# Altium PCB PCB2.PcbDoc (part 3 of 3)
Units mil, origin at the board's own origin, x right, y up, seen from the top; angles counter-clockwise.
Board outline 5145 x 1874.68 mil, 6 copper layers (Top Copper, Signal Layer 1, Signal Layer 2, Signal Layer 3, Signal Layer 4, Bottom Copper), stack 60.567 mil thick; 68 components, 78 nets, 530 pads, 288 vias.
Unrouted connection lines stored in the file: 13.
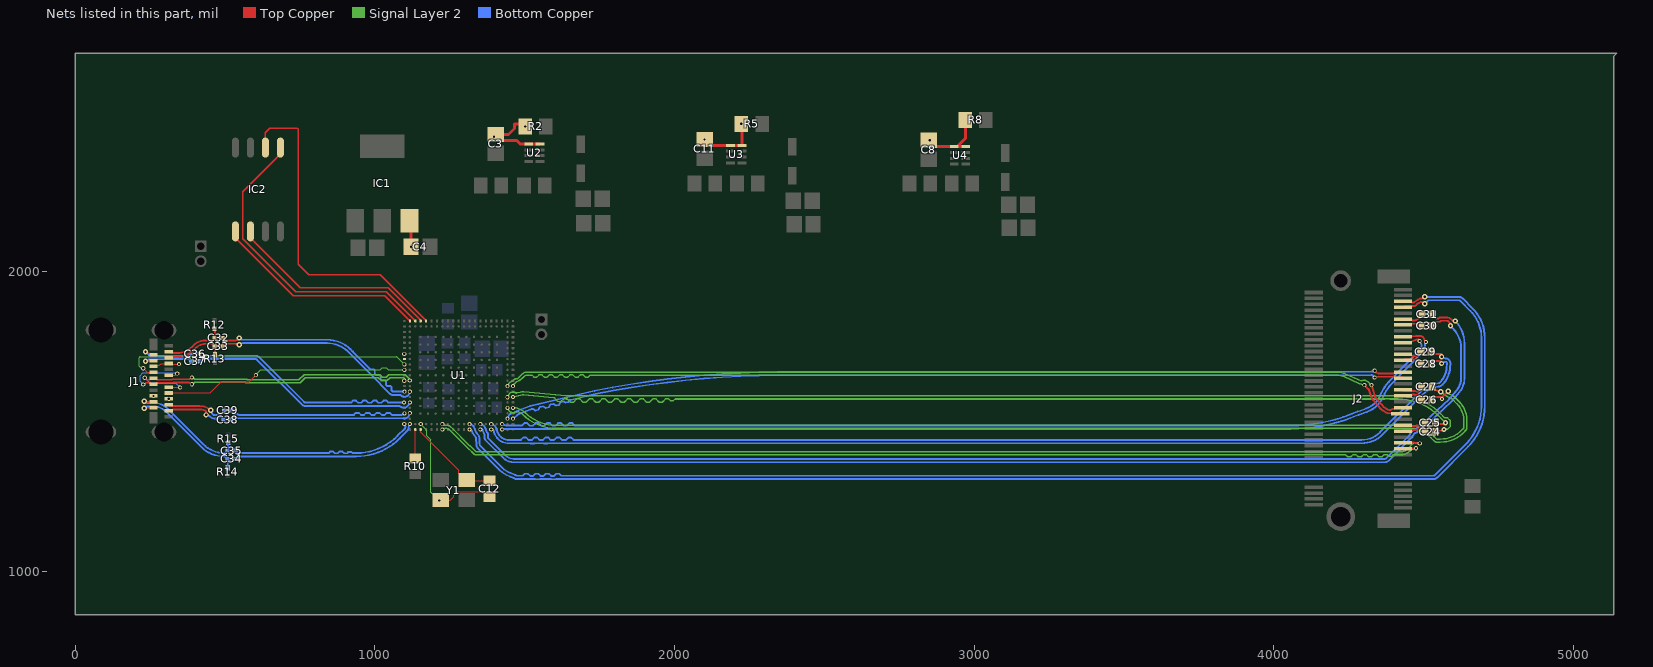
[diagram p6: the nets of this part, all layers, seen from the top]

## Via types
v1: diameter 13.78, hole 7.87, Top Copper to Bottom Copper, 220 vias
v2: diameter 11.81, hole 7.87, Top Copper to Bottom Copper, 44 vias
v3: diameter 17.72, hole 7.87, Top Copper to Bottom Copper, 24 vias

## Nets (pads, with @x,y where several pads share a name; then routed paths per layer and width w, separated by ;. In a path a pad name is that pad's centre, name@x,y a point inside that pad or via, vN(x,y) a via of type N, cw(c..) or ccw(c..) an arc to the next point about the centre after c; other vN are vias at no path point) (continued)
PRX0_N: J2.41 U1.N20 | length 3068.1
  Top Copper w6.22: v1(4326.12,1622.05) 4327.5,1616.99 ccw(c4333.5,1618.66) 4327.55,1616.82 4338.33,1582.02 ccw(c4344.27,1583.89) 4339.63,1579.73 ; 4339.66,1579.71 4357.48,1560.08 4359,1558.41 cw(c4347.19,1547.69) 4359.51,1557.81 4363.05,1553.51 4365.76,1550.2 cw(c4360.98,1546.23) 4365.8,1550.16 4365.84,1550.11 ccw(c4378.94,1560.78) 4372.38,1545.21 cw(c4370,1539.46) 4372.83,1545 4373.17,1544.83 cw(c4365.23,1529.3) 4375.23,1543.59 4377.1,1542.28 ccw(c4386.81,1556.1) 4392.81,1540.31 4403.7,1544.45 J2.41@4431.1,1547.24
  Signal Layer 2 w5.12: v1(1442.99,1618.78) 1444.11,1619.24 ccw(c1439.92,1622.18) 1444.77,1620.56 ccw(c1439.92,1622.18) 1444.97,1621.35 cw(c1461.1,1618.78) 1446.49,1626.1 cw(c1461.1,1618.78) 1450.05,1630.81 cw(c1461.1,1618.78) 1458.45,1634.9 ccw(c1457.57,1639.94) 1461.16,1636.3 1467.01,1642.14 cw(c1469.02,1640.12) 1469.02,1642.97 1471.84,1642.97 ccw(c1471.84,1652.63) 1478.67,1645.8 1490.66,1657.79 cw(c1509.59,1638.86) 1509.59,1665.63 2812.31,1665.63 4216.84,1665.63 cw(c4216.84,1660.51) 4217.43,1665.59 4218.01,1665.53 cw(c4216.26,1650.4) 4219.69,1665.24 4233.1,1662.13 cw(c4229.71,1647.28) 4236.01,1661.15 4236.87,1660.76 4283.17,1639.9 ccw(c4285.27,1644.56) 4283.22,1639.88 4283.49,1639.76 ; 4283.54,1639.74 4290.51,1636.59 ccw(c4292.61,1641.26) 4294.88,1636.67 cw(c4302.17,1622.05) 4313.31,1634 v1(4326.12,1622.05)
PRX0_P: J2.43 U1.N21 | length 3066.9
  Top Copper w6.22: v1(4302.17,1622.05) 4314.21,1610.07 ccw(c4326.12,1622.05) 4315.82,1608.66 cw(c4312.07,1603.7) 4317.93,1605.79 4327.84,1578.02 ccw(c4344.27,1583.89) 4331.2,1572.33 4357.87,1542.16 ccw(c4378.94,1560.78) 4367.71,1535 ; 4367.74,1534.99 cw(c4365.19,1529.31) 4368.74,1534.43 4370.77,1533.01 ccw(c4386.81,1556.1) 4386.81,1527.99 4395.08,1527.99 J2.43@4424.36,1530.35
  Signal Layer 2 w5.12: v1(1461.1,1618.78) cw(c1466.76,1618.78) v1@1462.31,1622.27 ; v1@1462.31,1622.28 1465.31,1626.09 cw(c1469.32,1622.91) 1465.68,1626.51 1469.2,1630.03 cw(c1476.03,1623.2) 1471.48,1631.72 1473.61,1632.86 1480.46,1636.52 ccw(c1471.84,1652.63) 1483.61,1638.65 1497.41,1650.26 ccw(c1494.12,1654.18) 1497.72,1650.55 1497.76,1650.59 cw(c1509.65,1638.69) 1509.65,1655.51 1521.65,1655.51 1524.21,1655.51 1530.88,1648.84 1540.88,1648.84 1548.06,1656.02 1558.06,1656.02 1565.24,1648.84 1575.24,1648.84 1582.43,1656.02 1592.43,1656.02 1599.61,1648.84 1609.61,1648.84 1616.79,1656.02 1626.79,1656.02 1633.97,1648.84 1643.97,1648.84 1651.15,1656.02 1661.15,1656.02 1668.33,1648.84 1678.33,1648.84 1685.51,1656.02 1695.51,1656.02 1702.69,1648.84 1712.69,1648.84 1719.36,1655.51 1745.08,1655.51 2809.44,1655.51 4212.65,1655.51 4215.1,1655.51 4216.26,1655.51 cw(c4216.26,1650.4) 4217.41,1655.38 4230.87,1652.26 cw(c4229.71,1647.28) 4231.8,1651.95 4232.72,1651.54 4286.39,1627.35 ccw(c4292.61,1641.26) 4287.82,1626.8 v1(4302.17,1622.05)
PRX1_N: J2.29 U1.W20 | length 3019.5
  Top Copper w6.22: v1(4336.74,1670.57) ccw(c4342.83,1671.84) 4338.41,1667.46 4340.68,1665.19 ccw(c4345.08,1669.59) 4342.7,1663.84 4348.12,1661.6 ccw(c4350.5,1667.35) 4350.5,1661.12 4399.04,1661.12 ccw(c4399.04,1663.58) 4400.78,1661.84 cw(c4402.51,1660.11) 4402.51,1662.56 4424.36,1662.56 ccw(c4424.36,1672.1) J2.29@4431.1,1665.35
  Bottom Copper w6.22: v1(1442.99,1510.12) ccw(c1439.5,1513.61) v1@1443.04,1510.16 ; v1@1443.02,1510.18 1443.87,1511.68 ccw(c1438.44,1514.71) 1444.5,1513.29 cw(c1465.03,1509.37) 1451.8,1525.56 cw(c1465.03,1509.37) 1455.57,1528.01 cw(c1458.36,1522.45) 1457.34,1528.59 1463.88,1529.68 ccw(c1461.1,1546.34) 1472.06,1533.49 cw(c1483.3,1520.14) 1476.99,1536.41 1516.49,1551.68 cw(c1522.78,1535.41) 1518.75,1552.39 1733.13,1603.03 cw(c2360.86,-1485.61) 1733.4,1603.08 cw(c2360.86,-1485.61) 2343.82,1666.12 4325.76,1667.17 cw(c4325.72,1649.72) 4326.52,1667.15 4330.78,1666.95 ccw(c4331.07,1673.17) 4336.51,1670.15 v1(4336.74,1670.57)
PRX1_P: J2.31 U1.W21 | length 3008
  Top Copper w6.22: 4344.62,1649.9 4399.04,1649.9 cw(c4399.04,1647.45) 4400.78,1649.18 ccw(c4402.51,1650.92) 4402.51,1648.46 4424.36,1648.46 cw(c4424.36,1638.92) J2.31@4431.1,1645.67
  Bottom Copper w6.22: v1(1461.1,1510.12) 1474.91,1521.63 1475.46,1522.09 cw(c1479.42,1517.3) 1476.09,1522.55 ccw(c1461.1,1546.34) 1479.31,1524.91 cw(c1483.3,1520.14) 1481.08,1525.95 1520.56,1541.23 cw(c1522.78,1535.41) 1521.33,1541.46 1523.29,1541.93 1527.29,1542.87 1535.81,1537.61 1545.54,1539.91 1550.8,1548.43 1551.26,1549.17 1560.99,1551.47 1561.74,1551.01 1570.26,1545.75 1579.99,1548.05 1585.25,1556.56 1585.72,1557.31 1595.45,1559.61 1596.2,1559.15 1604.71,1553.89 1614.45,1556.19 1619.71,1564.7 1620.17,1565.45 1629.9,1567.75 1630.65,1567.29 1636.54,1563.65 1646.27,1565.95 1649.91,1571.84 1652.94,1572.55 1670.35,1576.67 1735.54,1592.06 cw(c2360.86,-1485.61) 2343.14,1654.9 cw(c2364.34,-2129.91) 2343.74,1654.9 ; 2343.82,1654.9 2343.88,1654.9 4325.72,1655.94 cw(c4325.72,1649.72) 4330.1,1654.14 v1(4336.61,1647.64)
PRX2_N: J2.17 U1.AA19 | length 3294.3
  Top Copper w6.22: J2.17@4431.1,1783.46 4458.5,1784.98 4469.89,1784.98 ccw(c4470,1801.88) 4474.84,1785.69 cw(c4479.79,1768.97) 4479.83,1786.41 4486.6,1786.4 cw(c4486.56,1769.51) 4501.91,1776.57 4505.7,1768.34 ccw(c4511.33,1770.98) v1(4507.57,1766.02)
  Bottom Copper w6.22: v1(1424.88,1473.9) 1425.34,1473.94 ccw(c1424.77,1480.14) 1426.17,1474.07 1433.39,1475.74 cw(c1434.79,1469.68) 1434.79,1475.9 1516.38,1475.9 cw(c1516.38,1469.68) 1518,1475.68 ccw(c1521,1486.5) 1521,1475.28 1523.57,1475.28 1575.25,1475.28 1588.82,1475.28 1594.02,1475.28 1627.16,1475.28 1631.41,1475.28 ccw(c1631.39,1481.5) 1631.6,1475.28 1652.34,1475.9 cw(c1652.52,1469.68) 1652.52,1475.9 4056.53,1475.9 ccw(c4056.24,2044.17) 4056.58,1475.9 ccw(c4056.24,2044.17) 4282.35,1522.82 4311.18,1532.98 4311.26,1533.01 ccw(c4278.52,1622.69) 4364.97,1582.17 4368.76,1590.22 ccw(c4352.98,1597.66) 4369.12,1591.04 ccw(c4363.39,1593.45) 4369.18,1591.19 4370.11,1593.57 4370.44,1594.4 cw(c4484,1536.6) 4392.21,1624.98 4499.87,1736.88 ccw(c4487.27,1748.94) 4504.57,1746.69 ccw(c4470.54,1750.99) 4504.15,1757.84 cw(c4510.25,1759.03) 4505.35,1762.86 4505.72,1763.33 ccw(c4500.84,1767.19) 4506.41,1764.43 cw(c4511.97,1761.62) v1(4507.57,1766.02)
PRX2_P: J2.19 U1.Y19 | length 3291.6
  Top Copper w6.22: J2.19@4431.1,1763.78 4458.5,1766.57 4472.75,1772.85 cw(c4475.26,1767.16) 4472.96,1772.94 4477.49,1774.75 cw(c4479.79,1768.97) 4485.28,1771.9 v1(4486.56,1769.51)
  Bottom Copper w6.22: v1(1424.88,1492.01) 1437.63,1487.48 ccw(c1439.69,1493.35) 1439.69,1487.12 1487.64,1487.12 1490.75,1487.12 1498.95,1495.32 1508.95,1495.32 1517.77,1486.5 1527.77,1486.5 1536.6,1495.32 1546.6,1495.32 1555.42,1486.5 1565.42,1486.5 1574.24,1495.32 1584.24,1495.32 1593.06,1486.5 1603.06,1486.5 1611.88,1495.32 1621.88,1495.32 1630.7,1486.5 1640.7,1486.5 1649.53,1495.32 1659.53,1495.32 1667.73,1487.12 1677.01,1487.12 4056.71,1487.12 ccw(c4056.24,2044.17) 4277.92,1533.13 cw(c4282.35,1522.82) 4278.66,1533.42 4278.86,1533.49 4307.42,1543.55 4307.53,1543.59 ccw(c4278.52,1622.69) 4354.54,1586.37 ccw(c4278.52,1622.69) 4354.82,1586.97 4360.19,1598.98 cw(c4370.44,1594.4) 4360.41,1599.44 cw(c4484,1536.6) 4384.11,1632.75 4491.78,1744.66 ccw(c4487.27,1748.94) 4493.44,1748.16 ccw(c4470.54,1750.99) 4488.85,1765.03 cw(c4493.83,1768.76) 4488.25,1766.01 4488.52,1765.46 cw(c4493.36,1769.37) 4487.63,1766.95 v1(4486.56,1769.51)
PRX3_N: J2.5 U1.AA13 | length 4200.9
  Top Copper w6.22: J2.5@4431.1,1901.57 ccw(c4437.85,1908.32) 4437.85,1898.78 4459.69,1898.78 cw(c4459.69,1896.33) 4461.43,1898.06 ccw(c4463.16,1899.8) 4463.16,1897.34 4464.75,1897.34 ccw(c4464.75,1903.63) 4469.2,1899.19 ; 4469.23,1899.22 cw(c4473.61,1894.79) 4470.33,1900.08 4481.34,1906.9 ccw(c4472.44,1921.26) 4481.89,1907.26 4486.96,1910.68 cw(c4490.44,1905.52) 4490.44,1911.74 4494.1,1911.74 ccw(c4494.1,1917.97) 4497.86,1913.01 v3(4503.6,1917.36)
  Bottom Copper w6.22: v1(1316.22,1473.9) cw(c1315.66,1467.7) 1319.79,1472.36 1323.27,1469.27 cw(c1319.14,1464.62) 1324.89,1467 1326.42,1463.25 ccw(c1352.44,1473.9) 1330.47,1456.35 1336.41,1448.9 cw(c1331.55,1445.02) 1337.76,1445.4 1338.92,1423 ccw(c1356.34,1423.91) 1343.96,1411.62 1417.18,1338.4 ccw(c1476.62,1397.48) 1450.35,1317.89 1450.41,1317.88 ; 1450.45,1317.86 1450.86,1317.73 cw(c1448.91,1311.82) 1451.39,1317.53 1463.17,1312.32 cw(c1460.66,1306.63) 1463.93,1311.92 ccw(c1501.02,1370.89) 1465.95,1310.7 ccw(c1471.54,1320.43) 1466.26,1310.53 ccw(c1474.6,1325.85) 1474.53,1308.41 1532.99,1308.41 cw(c1532.96,1302.18) 1534.58,1308.19 ccw(c1537.57,1319.01) 1537.57,1307.78 1547.57,1307.78 ccw(c1547.57,1319.01) 1550.57,1308.19 cw(c1552.19,1302.18) 1552.16,1308.41 1586.93,1308.41 cw(c1586.9,1302.18) 1588.52,1308.19 ccw(c1591.52,1319.01) 1591.52,1307.78 1601.52,1307.78 ccw(c1601.52,1319.01) 1604.52,1308.19 cw(c1606.13,1302.18) 1606.1,1308.41 1607.46,1308.41 4532.6,1308.41 ccw(c4532.6,1325.85) 4544.9,1313.47 4648.68,1417.26 ; v3(4503.6,1917.36) cw(c4500.69,1911.87) 4503.81,1917.25 ccw(c4506.93,1922.64) 4506.93,1916.42 4617.7,1916.42 cw(c4617.7,1898.97) 4629.99,1911.35 4664.08,1877.26 cw(c4567.39,1780.56) 4704.14,1780.56 4704.14,1551.14 cw(c4514.79,1551.14) 4648.71,1417.29
PRX3_P: J2.7 U1.Y13 | length 4197.6
  Top Copper w6.22: J2.7@4431.1,1881.89 cw(c4437.85,1875.14) 4437.85,1884.68 4459.69,1884.68 ccw(c4459.69,1887.14) 4461.43,1885.4 cw(c4463.16,1883.67) 4463.16,1886.12 4467.39,1886.12 ccw(c4467.39,1897.27) 4475.27,1889.39 4479.03,1893.14 cw(c4483.41,1888.72) 4480.52,1894.23 ; 4480.53,1894.24 4489.83,1899.06 cw(c4492.69,1893.53) 4496.52,1898.44 cw(c4490.48,1890.7) 4497.42,1897.64 4499.55,1895.52 ccw(c4503.94,1899.91) v3(4503.94,1893.7)
  Bottom Copper w6.22: v1@1317.94,1491.29 ccw(c1321.5,1496.4) 1320.04,1490.35 cw(c1316.22,1473.9) 1322.05,1489.75 cw(c1316.22,1473.9) 1332.64,1477.85 ccw(c1338.68,1479.36) 1332.92,1477 1336.59,1468.04 1336.81,1467.5 ccw(c1352.44,1473.9) 1339.25,1463.35 1345.49,1455.52 cw(c1333.02,1445.58) 1348.94,1446.41 1349.9,1427.89 1350.13,1423.55 ccw(c1356.34,1423.91) 1351.91,1419.53 1425.13,1346.32 ccw(c1471.69,1392.58) 1445.17,1332.54 ; 1445.18,1332.54 1467.71,1322.59 cw(c1460.66,1306.63) 1469.9,1321.43 ccw(c1501.02,1370.89) 1471.54,1320.43 ; 1471.56,1320.42 ccw(c1474.6,1325.85) 1474.58,1319.63 1477.71,1319.63 1491.14,1319.63 1494.25,1319.63 1501.11,1326.48 1511.11,1326.48 1518.59,1319.01 1528.59,1319.01 1536.07,1326.48 1546.07,1326.48 1553.55,1319.01 1563.55,1319.01 1571.03,1326.48 1581.03,1326.48 1588.51,1319.01 1598.51,1319.01 1605.99,1326.48 1615.99,1326.48 1622.84,1319.63 1679.13,1319.63 4527.95,1319.63 4532.64,1319.63 ccw(c4532.6,1325.85) 4536.98,1321.43 4640.72,1425.16 ; v3(4503.94,1893.7) 4513.63,1903.39 cw(c4518.01,1898.97) 4518.01,1905.19 4617.7,1905.19 cw(c4617.7,1898.97) 4622.1,1903.37 4656.03,1869.43 ; 4640.75,1425.2 ccw(c4514.7,1551.18) 4692.91,1551.18 4692.91,1780.43 ccw(c4567.07,1780.43) 4656.06,1869.41
  other v1: 1316.22,1492.01
PTX0_N: C25.1 J2.47 | length 78.6
  Top Copper w6.22: J2.47@4431.1,1488.19 ccw(c4437.85,1494.93) 4437.85,1485.39 4459.69,1485.39 cw(c4459.69,1482.94) 4461.43,1484.68 ccw(c4463.16,1486.41) 4463.16,1483.96 4470.03,1483.96 ccw(c4470.03,1490.25) 4474.48,1485.8 cw(c4478.93,1481.35) 4478.93,1487.64 4484.98,1487.64 ccw(c4484.98,1516.39) C25.1@4505.31,1496.06
PTX0_P: C24.1 J2.49 | length 79.1
  Top Copper w6.22: J2.49@4431.1,1468.5 cw(c4437.85,1461.76) 4437.85,1471.3 4459.69,1471.3 ccw(c4459.69,1473.75) 4461.43,1472.02 cw(c4463.16,1470.28) 4463.16,1472.74 4474.68,1472.74 ccw(c4474.68,1479.02) 4479.13,1474.58 cw(c4483.58,1470.13) 4483.58,1476.42 4487.35,1476.42 ccw(c4488.31,1477.38) 4488.31,1476.02 4489.48,1476.02 cw(c4489.48,1461.17) 4499.98,1471.67 C24.1@4503.77,1467.88 ; C24.1@4503.78,1467.88 cw(c4502.43,1466.54) C24.1@4504.33,1466.54
PTX0_PD_N: C25.2 U1.R21 | length 3262.6
  Top Copper w6.22: C25.2@4539.96,1496.06 ccw(c4548.18,1504.28) 4548.18,1492.66 4572.17,1492.66 v3(4572.95,1496.2)
  Signal Layer 2 w5.12: v1(1461.1,1582.56) 1464.63,1583.17 ccw(c1463.72,1588.2) 1464.95,1583.23 1487.46,1588.8 cw(c1493.81,1563.11) 1496.34,1589.45 1597.51,1579.72 1600.06,1579.48 1609.66,1567.83 1619.61,1566.87 1631.26,1576.48 1637.7,1575.86 ccw(c1638.15,1580.95) 1637.76,1575.85 1638.02,1575.83 ccw(c1639.18,1591.02) 1639.11,1575.79 1642.11,1575.79 1652.78,1565.12 1662.78,1565.12 1673.45,1575.79 1673.96,1576.3 1683.96,1576.3 1684.47,1575.79 1695.15,1565.12 1705.15,1565.12 1715.82,1575.79 1716.33,1576.3 1726.33,1576.3 1726.84,1575.79 1737.51,1565.12 1747.51,1565.12 1758.19,1575.79 1758.7,1576.3 1768.7,1576.3 1769.21,1575.79 1779.88,1565.12 1789.88,1565.12 1800.55,1575.79 1801.06,1576.3 1811.06,1576.3 1811.58,1575.79 1822.25,1565.12 1832.25,1565.12 1842.92,1575.79 1843.43,1576.3 1853.43,1576.3 1853.94,1575.79 1864.61,1565.12 1874.61,1565.12 1885.29,1575.79 1885.8,1576.3 1895.8,1576.3 1896.31,1575.79 1906.98,1565.12 1916.98,1565.12 1927.65,1575.79 1928.17,1576.3 1938.17,1576.3 1938.68,1575.79 1949.35,1565.12 1959.35,1565.12 1970.02,1575.79 1970.53,1576.3 1980.53,1576.3 1981.04,1575.79 1986.52,1570.31 1996.52,1570.31 2001.99,1575.79 2028,1575.79 4369.93,1575.79 ccw(c4369.88,1591.02) 4374.2,1576.41 cw(c4378.94,1560.78) 4383.7,1576.41 ccw(c4388,1591.02) 4387.92,1575.79 4414.93,1575.79 cw(c4414.83,1386.19) 4548.89,1520.26 v3(4572.95,1496.2)
PTX0_PD_P: C24.2 U1.R20 | length 3267.3
  Top Copper w6.22: C24.2@4538.98,1466.54 cw(c4547.2,1458.31) 4547.2,1469.94 4572.17,1469.94 v3(4568.11,1474)
  Signal Layer 2 w5.12: v1(1442.32,1581.69) 1446.55,1589.98 cw(c1461.1,1582.56) 1467.62,1597.54 cw(c1461.1,1582.56) 1469.76,1596.41 ccw(c1472.44,1600.77) 1473.63,1595.8 1485.12,1598.64 cw(c1493.81,1563.11) 1497.35,1599.51 1638.21,1585.97 1638.73,1585.92 ccw(c1639.19,1591.02) 1639.19,1585.9 4369.91,1585.9 ccw(c4369.88,1591.02) 4371.32,1586.11 cw(c4378.94,1560.78) 4386.56,1586.11 ccw(c4388,1591.02) 4387.97,1585.9 4414.9,1585.9 cw(c4414.83,1386.19) 4556.04,1527.41 4570.84,1512.62 4579.75,1512.62 4589.36,1503 4589.36,1484.22 4580.2,1475.06 4569.17,1475.06 v3(4568.11,1474)
PTX1_N: C27.1 J2.35 | length 72.5
  Top Copper w6.22: J2.35@4431.1,1606.3 ccw(c4437.85,1613.05) 4437.85,1603.51 4459.69,1603.51 cw(c4459.69,1601.05) 4461.43,1602.79 ccw(c4463.16,1604.52) 4463.16,1602.07 4473.48,1602.07 cw(c4473.48,1599.55) 4475.27,1601.33 ccw(c4477.05,1603.11) 4477.05,1600.59 4478.58,1600.59 ccw(c4478.58,1606.81) 4482.98,1602.41 4483.32,1602.76 ; 4483.33,1602.76 ccw(c4479.75,1606.33) 4484.8,1606.33 cw(c4489.86,1606.33) 4486.28,1609.9 C27.1@4493.5,1617.13
PTX1_P: C26.1 J2.37 | length 72.5
  Top Copper w6.22: J2.37@4431.1,1586.61 cw(c4437.85,1579.87) 4437.85,1589.41 4459.69,1589.41 ccw(c4459.69,1591.86) 4461.43,1590.13 cw(c4463.16,1588.39) 4463.16,1590.85 4468.84,1590.85 cw(c4468.84,1588.33) 4470.62,1590.11 ccw(c4472.4,1591.89) 4472.4,1589.37 4478.58,1589.37 cw(c4478.58,1583.15) 4482.98,1587.55 4483.32,1587.2 ; 4483.33,1587.2 cw(c4479.75,1583.63) 4484.8,1583.63 ccw(c4489.86,1583.63) 4486.28,1580.06 C26.1@4493.5,1572.83
PTX1_PD_N: C27.2 U1.U21 | length 3403.2
  Top Copper w6.22: C27.2@4528.15,1617.13 4536.85,1607.64 v3(4556.98,1599.56)
  Signal Layer 2 w5.12: v1(1461.1,1546.34) 1469.59,1546.34 cw(c1469.59,1541.22) 1471.26,1546.06 1484.38,1541.5 cw(c1470.43,1501.02) 1500.76,1531.24 ccw(c1604.79,1635.38) 1604.62,1488.18 1604.75,1488.18 ; 1604.79,1488.18 1903.54,1488.18 4447.45,1488.18 cw(c4447.45,1368.43) 4532.13,1453.11 4543.31,1441.93 4556.02,1441.93 ccw(c4556.02,1541.93) 4626.73,1471.22 4633.86,1478.35 4633.86,1506.28 ccw(c4558.59,1506.28) 4611.81,1559.5 4594.87,1576.45 4594.83,1576.48 ccw(c4591.26,1572.81) 4593.27,1577.52 4579.13,1583.55 cw(c4585.11,1597.56) 4575.67,1585.61 4573.12,1587.63 ccw(c4562.99,1574.8) 4572.41,1588.16 cw(c4581.84,1601.59) 4572.08,1588.39 v3(4556.98,1599.56)
PTX1_PD_P: C26.2 U1.U20 | length 3471.2
  Top Copper w6.22: C26.2@4528.15,1572.83 4536.85,1582.32 4557.21,1582.6 ccw(c4556.98,1599.56) 4569.48,1588.08 v3(4581.84,1601.59)
  Signal Layer 2 w5.12: v1(1442.99,1546.34) 1446.36,1539.29 ccw(c1461.1,1546.34) 1461.23,1530 ccw(c1461.1,1546.34) 1470.18,1532.76 cw(c1473,1528.49) 1473.46,1533.58 cw(c1470.43,1501.02) 1493.6,1524.1 ccw(c1604.79,1635.38) 1604.79,1478.07 1977.64,1478.07 4447.3,1478.07 ; 4447.34,1478.07 cw(c4447.28,1368.01) 4525.1,1445.83 4536.17,1434.76 ccw(c4543.28,1441.87) 4543.28,1431.81 4556.07,1431.81 ccw(c4556.07,1541.81) 4633.85,1464.03 4641.04,1471.23 ccw(c4633.86,1478.35) 4643.97,1478.35 4643.97,1506.28 ccw(c4558.59,1506.28) 4619,1566.62 4601.99,1583.63 ccw(c4591.26,1572.81) 4597.24,1586.82 4583.12,1592.85 cw(c4585.11,1597.56) 4581.27,1600.94 v3(4581.84,1601.59)
  other v1: 4561.39,1575.98
PTX2_N: C29.1 J2.23 | length 67.8
  Top Copper w6.22: J2.23@4431.1,1724.41 4452.22,1724.41 cw(c4452.22,1716) 4458.17,1721.95 ccw(c4464.12,1727.89) 4464.12,1719.48 4475.63,1719.48 ccw(c4475.63,1725.7) 4480.03,1721.3 4480.99,1722.27 ccw(c4478.92,1724.34) 4481.85,1724.34 cw(c4484.78,1724.34) 4482.71,1726.41 C29.1@4490.55,1734.25
PTX2_P: C28.1 J2.25 | length 68
  Top Copper w6.22: J2.25@4431.1,1704.72 cw(c4437.85,1697.98) 4437.85,1707.52 4461.41,1707.52 cw(c4463.2,1705.73) 4463.2,1708.26 4476.61,1708.26 cw(c4476.61,1702.04) 4481.01,1706.44 4482.12,1705.33 cw(c4480.4,1703.61) 4482.84,1703.61 ccw(c4485.27,1703.61) 4483.54,1701.89 C28.1@4491.54,1693.9
PTX2_PD_N: C29.2 U1.AA17 | length 3433
  Top Copper w6.22: C29.2@4525.2,1734.25 ccw(c4546.49,1755.54) 4546.49,1725.43 4560.04,1725.43 v3(4560.04,1717.17)
  Bottom Copper w6.22: v1(1388.66,1473.9) cw(c1390.38,1467.92) 1396.18,1470.17 1397.3,1467.28 cw(c1391.5,1465.02) 1397.54,1466.54 ccw(c1446.72,1478.74) 1449.49,1428.14 cw(c1449.8,1421.93) 1449.76,1428.15 1516.74,1428.15 cw(c1516.71,1421.93) 1518.33,1427.93 ccw(c1521.33,1438.75) 1521.33,1427.53 1531.33,1427.53 ccw(c1531.33,1438.75) 1534.32,1427.94 cw(c1535.94,1421.93) 1535.91,1428.15 1561.33,1428.15 cw(c1561.29,1421.93) 1562.92,1427.93 ccw(c1565.91,1438.75) 1565.91,1427.53 1575.91,1427.53 ccw(c1575.91,1438.75) 1578.91,1427.94 cw(c1580.53,1421.93) 1580.49,1428.15 4293.61,1428.15 4293.8,1428.15 ccw(c4293.7,1525.84) 4362.33,1456.32 ; 4362.34,1456.33 4495.35,1589.34 ; v3(4560.04,1717.17) cw(c4560.04,1709.66) 4565.35,1714.97 4566.02,1714.3 ccw(c4572.96,1721.24) 4572.96,1711.43 4574.07,1711.43 cw(c4574.07,1698.95) 4582.89,1707.77 4584.34,1706.32 cw(c4572.01,1693.98) 4589.45,1693.98 cw(c4545.96,1694) 4588.35,1684.27 ccw(c4594.43,1682.93) 4588.21,1683.13 cw(c4499.91,1685.34) 4565.89,1626.62 4563.07,1623.45 cw(c4550.04,1635.05) 4554.5,1618.19 4554.19,1618.1 cw(c4552.6,1624.12) 4553.99,1618.05 4551.88,1617.57 cw(c4550.49,1623.64) 4550.86,1617.42 4550.76,1617.42 4550.12,1617.38 ccw(c4550.43,1611.17) 4549.42,1617.31 ccw(c4566.36,1518.3) 4495.42,1589.41 ; 4495.36,1589.35 cw(c4505.26,1579.56) 4495.42,1589.41 ; 4495.35,1589.34 4495.42,1589.41
PTX2_PD_P: C28.2 U1.Y17 | length 3439.9
  Top Copper w6.22: C28.2@4526.18,1693.9 cw(c4547.47,1672.61) 4547.47,1702.72 4551.15,1702.72 ccw(c4560.04,1717.17) 4560.04,1700.2 v3(4560.04,1694.46)
  Bottom Copper w6.22: v3(4560.04,1694.46) ccw(c4560.04,1701.97) 4565.35,1696.66 4566.7,1698 cw(c4572.01,1692.69) 4572.01,1700.2 cw(c4572.01,1693.98) 4578.23,1693.97 cw(c4545.96,1694) 4577.42,1686.81 4577.4,1686.74 ccw(c4594.43,1682.93) 4576.99,1683.47 cw(c4499.91,1685.34) 4557.51,1634.08 4554.69,1630.91 cw(c4550.04,1635.05) 4550.98,1628.9 4547.92,1628.44 ccw(c4566.37,1518.3) 4547.31,1628.33 ccw(c4566.37,1518.3) 4547.14,1628.3 ccw(c4566.37,1518.3) 4487.5,1597.36 ccw(c4566.37,1518.3) 4487.46,1597.33 4354.42,1464.28 cw(c4293.7,1525.84) 4293.83,1439.37 1710.07,1439.37 1666.34,1439.37 1663.23,1439.37 1655.82,1446.78 1645.82,1446.78 1638.42,1439.37 1624.42,1439.37 1616.5,1447.29 1606.5,1447.29 1597.97,1438.75 1587.97,1438.75 1579.43,1447.29 1569.43,1447.29 1560.89,1438.75 1550.89,1438.75 1542.35,1447.29 1532.35,1447.29 1523.82,1438.75 1513.82,1438.75 1505.28,1447.29 1495.28,1447.29 1487.36,1439.37 1484.25,1439.37 1449.71,1439.37 ccw(c1449.8,1421.93) 1448.85,1439.35 cw(c1446.72,1478.74) 1408.2,1470.2 1404.43,1479.94 ccw(c1388.66,1473.9) 1393.15,1490.18 cw(c1394.86,1496.16) 1392.46,1490.42 1390.02,1491.45 v1(1388.66,1492.01) ; v1(1388.66,1492.01) cw(c1388.66,1487.07) 1392.15,1490.56 v1(1388.66,1492.01)
PTX3_N: C31.1 J2.11 | length 72.9
  Top Copper w6.22: J2.11@4431.1,1842.52 ccw(c4437.85,1849.27) 4437.85,1839.73 4460.03,1839.73 cw(c4460.03,1838.09) 4461.19,1839.25 ccw(c4463.5,1841.56) 4463.5,1838.29 4471.19,1838.29 ccw(c4471.19,1846.86) 4477.24,1840.79 4479.76,1843.31 ccw(c4479.76,1845.73) 4481.47,1844.02 ; 4481.48,1844.02 4485.35,1847.89 ccw(c4484.3,1848.95) 4485.79,1848.95 cw(c4487.28,1848.95) 4486.23,1850.01 C31.1@4494.49,1858.27
PTX3_P: C30.1 J2.13 | length 66.6
  Top Copper w6.22: J2.13@4431.1,1822.83 4438.18,1822.83 ccw(c4438.18,1827.6) 4441.56,1824.23 4442.95,1825.63 cw(c4446.42,1822.17) 4446.42,1827.07 4477.14,1827.07 cw(c4477.14,1802.54) C30.1@4494.49,1819.88
PTX3_PD_N: C31.2 U1.AA15 | length 3755.1
  Top Copper w6.22: C31.2@4529.13,1858.27 4537.4,1850.01 cw(c4536.34,1848.95) 4537.83,1848.95 ccw(c4539.33,1848.95) 4538.27,1847.89 4539.66,1846.51 ccw(c4544.06,1850.91) 4544.06,1844.69 4547.55,1844.69 ccw(c4547.55,1850.47) 4551.64,1846.38 cw(c4555.73,1842.29) 4555.73,1848.07 4576.35,1848.07 cw(c4576.35,1826.28) 4591.76,1841.69 ccw(c4600.32,1850.26) 4600.32,1838.14 cw(c4600.32,1830.64) v3(4605.63,1835.95)
  Bottom Copper w6.22: v1(1352.44,1473.9) ccw(c1352.44,1478.83) 1355.93,1475.34 cw(c1354.64,1469.26) 1360.47,1471.43 1365.76,1457.27 cw(c1359.92,1455.11) 1366.14,1455.11 1366.14,1446.82 ccw(c1377.29,1446.82) 1369.41,1438.94 1429.73,1378.61 ccw(c1463.17,1412.04) 1463.17,1364.76 4370.85,1364.76 ccw(c4370.85,1382.21) 4383.19,1369.87 4460.93,1447.61 ccw(c4448.54,1459.9) 4464.74,1453.42 cw(c4480.47,1447.26) 4474.3,1462.98 ccw(c4467.83,1479.18) 4479.41,1466.14 4479.93,1466.6 cw(c4484.06,1461.94) 4482.8,1468.04 ccw(c4478.55,1489.15) 4484.78,1468.54 ccw(c4478.55,1489.15) 4487.62,1469.62 ccw(c4480.26,1485.43) 4492.23,1472.75 4592.98,1567.03 ccw(c4581.06,1579.77) 4594.44,1568.57 4613.53,1591.38 cw(c4618.28,1587.37) 4613.91,1591.8 ccw(c4559.97,1645.7) 4636.22,1645.7 4636.22,1762.09 ccw(c4531.77,1762.09) v3(4605.63,1835.95)
PTX3_PD_P: C30.2 U1.Y15 | length 3718.4
  Top Copper w6.22: C30.2@4529.13,1819.88 4537.4,1828.14 ccw(c4536.34,1829.2) 4537.83,1829.2 cw(c4539.33,1829.2) 4538.27,1830.26 4539.66,1831.64 cw(c4544.06,1827.24) 4544.06,1833.46 4552.2,1833.46 ccw(c4552.2,1839.25) 4556.29,1835.16 cw(c4560.38,1831.07) 4560.38,1836.85 4576.03,1836.85 cw(c4576.03,1825.51) 4584.05,1833.53 cw(c4576.03,1825.51) 4587.37,1825.51 4587.37,1825.19 ccw(c4594.88,1825.19) v3(4589.57,1819.88)
  Bottom Copper w6.22: v1(1352.44,1492.01) 1355.93,1490.56 ccw(c1358.64,1496.16) 1356.93,1490.18 cw(c1352.44,1473.9) 1368.19,1479.99 1372.91,1467.8 ccw(c1388.66,1473.9) 1378.09,1460.73 ccw(c1379.83,1458.99) 1377.36,1458.99 1377.36,1446.85 1437.64,1386.57 ccw(c1463.2,1412.14) 1463.2,1375.98 4366.2,1375.98 4370.85,1375.98 ccw(c4370.85,1382.21) 4375.25,1377.81 4452.97,1455.52 ccw(c4448.54,1459.9) 4454.32,1457.58 cw(c4480.47,1447.26) 4470.15,1473.41 ccw(c4467.83,1479.18) 4471.98,1474.54 4472.51,1475.02 cw(c4484.06,1461.94) 4480.6,1479.04 ccw(c4478.55,1489.15) 4482.86,1479.78 ccw(c4480.26,1485.43) 4484.54,1480.92 4585.33,1575.24 ccw(c4581.06,1579.77) 4585.86,1575.81 4586.27,1576.3 4604.91,1598.57 cw(c4618.28,1587.37) 4605.93,1599.69 ccw(c4559.83,1645.75) 4625,1645.75 4625,1746.06 ccw(c4532.33,1746.06) 4597.86,1811.59 v3(4589.57,1819.88)
REFCLK_N: J2.53 U1.Y8 | length 3366.2
  Top Copper w6.22: J2.53@4431.1,1429.13 cw(c4437.85,1422.39) 4433.06,1430.64 cw(c4437.85,1422.39) 4437.85,1431.93 4459.82,1431.93 cw(c4459.82,1425.71) 4460.68,1431.87 4479,1429.31 ccw(c4479.86,1435.47) 4480.43,1429.27 cw(c4480.96,1423.08) 4482.64,1429.07 v1(4487.33,1427.76)
  Signal Layer 2 w5.12: v1(1225.67,1492.01) cw(c1225.67,1486.35) 1229.73,1490.29 ccw(c1233.31,1493.94) 1231.46,1489.17 cw(c1225.67,1473.9) 1232.96,1488.52 ccw(c1235.21,1493.11) 1234.84,1488.01 1240.13,1488.01 cw(c1240.13,1468.4) 1254,1482.27 1316.25,1420.01 ccw(c1318.32,1422.08) 1318.32,1419.16 1337.6,1399.88 4425.09,1399.88 ccw(c4425.09,1430.49) 4446.74,1408.85 4464.99,1427.1 cw(c4470.06,1422.03) 4470.06,1429.2 4470.21,1429.2 cw(c4470.21,1424.08) 4470.64,1429.18 v1(4487.33,1427.76)
REFCLK_P: J2.55 U1.AA8 | length 3363.6
  Top Copper w6.22: J2.55@4431.1,1409.45 4458.5,1411.39 v1(4474.71,1411.39)
  Signal Layer 2 w5.12: v1(1225.67,1473.9) ccw(c1225.67,1479.56) v1@1229.67,1475.55 ; v1@1229.72,1475.61 cw(c1233.31,1471.96) 1231.47,1476.74 ccw(c1225.67,1492.01) 1232.59,1477.21 ccw(c1225.67,1492.01) 1232.95,1477.38 cw(c1235.21,1472.79) 1234.84,1477.89 1238.04,1477.89 cw(c1238.04,1463.34) 1248.32,1473.64 ; 1248.33,1473.63 1312.49,1409.47 ccw(c1313.52,1410.5) 1313.52,1409.04 cw(c1313.52,1407.58) 1314.56,1408.61 1330.46,1392.71 ccw(c1337.57,1399.82) 1337.57,1389.76 4237.2,1389.76 4239.76,1389.76 4246.69,1382.83 4256.69,1382.83 4264.14,1390.28 4274.14,1390.28 4281.58,1382.83 4291.58,1382.83 4299.02,1390.28 4309.02,1390.28 4316.47,1382.83 4326.47,1382.83 4333.91,1390.28 4343.91,1390.28 4351.35,1382.83 4361.35,1382.83 4368.8,1390.28 4378.8,1390.28 4384.16,1384.91 4394.16,1384.91 4399.02,1389.76 4401.57,1389.76 4425.12,1389.76 ccw(c4425.12,1430.42) 4453.87,1401.67 4457.51,1405.31 cw(c4475.19,1387.61) 4457.96,1405.75 cw(c4461.5,1402.06) 4460.02,1406.96 v1(4474.71,1411.39)
REXT: R10.2 U1.AA3 | length 97
  Top Copper w3.5: R10.2@1134.84,1376.97 1135.12,1377.24 U1.AA3@1135.12,1473.9
RST#: U1.H1
SBU1: J1.A8 U1.K1 | length 824.7
  Top Copper w3.5: J1.A8@312.8,1595.79 448.67,1595.79 ccw(c448.67,1599.29) 451.13,1596.8 486.45,1632.12 cw(c488.92,1629.64) 488.92,1633.14 580.97,1633.14 v1(603.35,1655.51)
  Signal Layer 2 w3.5: v1(603.35,1655.51) 603.35,1657.48 618.98,1673.11 1018.16,1673.11 1025.03,1679.98 1037.96,1679.98 1044.83,1673.11 v1(1098.9,1673.11)
SBU2: J1.B8 U1.J1 | length 984.4
  Top Copper w3.5: v1(227.36,1678.48) 241.16,1664.69 J1.B8@261.61,1664.69
  Signal Layer 2 w3.5: v1@227.36,1672.24 224.24,1675.36 214.36,1685.25 214.36,1714.02 cw(c217.86,1714.02) 217.86,1717.52 1071.15,1717.52 cw(c1071.15,1714.02) 1073.62,1716.49 v1(1098.9,1691.22)
SPI_CLK: IC2.6 U1.A5 | length 1124.3
  Top Copper w5: IC2.6@635,2414.76 635,2465 650,2480 742.07,2480 745,2477.07 745,2025 780,1990 1017.44,1990 U1.A5@1171.34,1836.1
SPI_CS: IC2.1 U1.A2 | length 718.6
  Top Copper w5: IC2.1@535,2135.24 535,2113.58 728.48,1920.1 1033.01,1920.1 U1.A2@1117.01,1836.1
SPI_DI: IC2.2 U1.A4 | length 706
  Top Copper w5: IC2.2@585,2135.24 585,2113.58 751.48,1947.1 1044.19,1947.1 1153.23,1838.07 U1.A4@1153.23,1836.1
SPI_DO: IC2.5 U1.A3 | length 1045.7
  Top Copper w5: IC2.5@685,2414.76 685,2393.11 560,2268.11 560,2110 736.4,1933.6 1038.6,1933.6 1130.51,1841.69 1130.51,1840.71 U1.A3@1135.12,1836.1
UD_N: J1.A7 J1.B7 U1.M2 | length 1092.3
  Top Copper w3.5: J1.A7@312.8,1615.47 314.09,1614.17 v1(350.39,1614.17)
  Top Copper w5.46: v1(232.28,1646.65) 233.38,1646.65 239.65,1640.39 249.13,1640.39 253.74,1645 J1.B7@261.61,1645 269.49,1645 274.1,1640.39 322.27,1640.39 323.39,1641.51 380.44,1641.51 386.57,1647.64 v1(389.76,1647.64)
  Signal Layer 2 w4.69: v1(389.76,1647.64) 392.51,1647.64 399.02,1641.12 571.93,1641.12 573.74,1639.31 746.85,1639.31 764.53,1656.99 1015.97,1656.99 1024.79,1648.17 1038.21,1648.17 1047.03,1656.99 1101.3,1656.99 1114.55,1643.74 1114.55,1640.21 1116.61,1638.15 v1(1116.61,1637.29)
  Bottom Copper w3.5: v1(232.28,1646.65) 248.99,1629.94 334.62,1629.94 v1(350.39,1614.17)
UD_P: J1.A6 J1.B6 U1.M1 | length 1102.5
  Top Copper w3.5: J1.A6@312.8,1654.84 313.11,1654.53 334.74,1654.53 v1(340.64,1660.43)
  Top Copper w5.46: v1(227.36,1624.02) 230.68,1624.02 236.59,1629.93 249.13,1629.93 253.74,1625.32 J1.B6@261.61,1625.32 269.49,1625.32 274.1,1629.93 326.6,1629.93 327.72,1631.05 380.44,1631.05 386.57,1624.92 v1(389.76,1624.92)
  Signal Layer 2 w4.69: v1(389.76,1624.92) 392.51,1624.92 399.02,1631.44 567.92,1631.44 569.73,1629.63 750.87,1629.63 768.54,1647.3 1011.96,1647.3 1020.77,1638.48 1042.22,1638.48 1051.04,1647.3 1097.29,1647.3 1100.04,1644.56 1100.04,1639.29 1098.43,1637.67 v1(1098.43,1636.81)
  Bottom Copper w3.5: v1(227.36,1624.02) 216.68,1634.7 216.68,1653.12 226.43,1662.87 338.2,1662.87 v1(340.64,1660.43)
URX0_N: C33.1 J1.A3 R13.2 | length 198.2
  Top Copper w6.22: J1.A3@312.8,1713.9 cw(c319.54,1707.15) 319.54,1716.69 324.66,1716.69 ccw(c324.66,1719.14) 326.39,1717.41 cw(c328.12,1715.68) 328.12,1718.13 344.62,1718.13 ccw(c344.62,1789.84) 395.32,1739.13 401.69,1745.5 cw(c437.03,1710.16) 437.03,1760.14 455.16,1760.14 cw(c455.16,1753.91) 459.56,1758.31 461.38,1756.49 ccw(c463.18,1756.49) 461.9,1755.22 466.34,1750.79 466.34,1723.62 R13.2@466.54,1723.43
URX0_P: C32.1 J1.A2 R12.1 | length 202.9
  Top Copper w6.22: J1.A2@312.8,1733.58 ccw(c319.54,1740.33) 319.54,1730.79 324.66,1730.79 cw(c324.66,1728.34) 326.39,1730.07 ccw(c328.13,1731.8) 328.13,1729.35 339.97,1729.35 ccw(c339.97,1801.06) 390.67,1750.35 395.06,1754.73 cw(c435.2,1714.58) 435.2,1771.36 456.14,1771.36 ccw(c456.14,1777.58) 460.54,1773.18 462.36,1775 cw(c464.16,1775) 462.89,1776.28 465.45,1778.83 cw(c467.13,1777.15) C32.1@467.13,1779.53 466.34,1780.32 466.34,1810.24 R12.1@465.55,1811.02
URX0_PD_N: C33.2 U1.P2 | length 709.5
  Top Copper w6.22: C33.2@490.55,1751.97 495.31,1755.75 cw(c501,1753.23) 497.65,1758.47 cw(c503.37,1749.49) 503.37,1760.14 534.32,1760.14 cw(c534.32,1750.33) 540.89,1757.62 ccw(c545.01,1762.28) v3(547.24,1756.47)
  Bottom Copper w6.22: v3(547.24,1756.47) ccw(c547.24,1763.98) 552.55,1758.67 cw(c561.12,1750.11) 561.12,1762.22 841.04,1762.22 cw(c841.04,1662.22) 911.75,1732.93 985.24,1659.45 1052.35,1592.34 ccw(c1060.29,1600.27) 1060.29,1589.05 1084.17,1589.05 cw(c1084.13,1582.83) 1088.2,1587.54 ccw(c1099.3,1600.27) 1115.34,1595 v1(1117.13,1600.39)
URX0_PD_P: C32.2 U1.P1 | length 708.9
  Top Copper w6.22: C32.2@491.54,1779.53 496.3,1775.75 ccw(c501.99,1778.27) 498.58,1773.06 ccw(c504.35,1782.01) 504.35,1771.36 534.32,1771.36 ccw(c534.32,1781.17) 541.26,1774.23 541.93,1774.91 cw(c547.24,1769.6) 544.3,1776.5 ccw(c541.8,1782.2) v3(547.24,1779.19)
  Bottom Copper w6.22: v3(547.24,1779.19) cw(c547.24,1771.68) 552.55,1776.99 ccw(c561.12,1785.55) 561.12,1773.44 841.18,1773.44 cw(c841.18,1662.54) 919.6,1740.96 926.73,1733.82 983.3,1677.26 985.5,1675.06 996.39,1675.06 999.92,1671.52 999.92,1660.63 999.92,1659.75 1003.46,1656.22 1004.34,1656.22 1015.22,1656.22 1018.76,1652.68 1018.76,1641.8 1018.76,1640.92 1022.29,1637.38 1023.17,1637.38 1034.06,1637.38 1037.59,1633.85 1037.59,1622.96 1037.59,1622.08 1041.13,1618.55 1042.01,1618.55 1052.8,1618.55 1056.34,1615.01 1056.34,1604.22 1059.84,1600.71 1060.29,1600.27 v1(1099.3,1600.27)
URX1_N: C35.1 J1.B3 R15.1 | length 405.4
  Top Copper w6.22: v3(230.31,1567.78) ccw(c233.97,1571.44) 233.97,1566.26 J1.B3@261.61,1566.26
  Bottom Copper w6.22: v3(230.31,1567.78) cw(c230.31,1560.27) 235.62,1565.58 236.3,1564.9 ccw(c243.24,1571.84) 243.24,1562.03 264.74,1562.03 cw(c264.74,1500.29) 308.4,1543.95 428.23,1424.12 ccw(c497.61,1493.5) 497.61,1395.38 ccw(c497.61,1406.02) 505.14,1398.49 ccw(c503.87,1399.76) 505.67,1399.76 508.75,1402.85 cw(c510.43,1401.17) C35.1@510.43,1403.54 510.43,1424.57 R15.1@510.83,1430.12
URX1_P: C34.1 J1.B2 R14.1 | length 407.7
  Top Copper w6.22: v3(230.31,1545.06) cw(c233.97,1541.4) 233.97,1546.57 J1.B2@261.61,1546.57
  Bottom Copper w6.22: v3(230.31,1545.06) ccw(c230.31,1552.57) 235.62,1547.26 236.3,1547.93 cw(c243.24,1541) 243.24,1550.81 262.42,1550.81 cw(c262.42,1494.68) 302.11,1534.37 420.71,1415.76 ccw(c497.02,1492.08) 497.02,1384.15 cw(c497.02,1373.5) 504.55,1381.03 cw(c503.28,1379.76) 505.08,1379.76 508.16,1376.68 ccw(c509.84,1378.36) C34.1@509.84,1375.98 ccw(c511.27,1374.56) 509.25,1374.56 R14.1@509.25,1346.46
URX1_PD_N: C35.2 U1.Y1 | length 622.9
  Bottom Copper w6.22: C35.2@534.84,1403.54 cw(c534.84,1401.17) 536.52,1402.85 539.08,1400.29 cw(c537.81,1399.02) 539.61,1399.02 541.43,1397.2 ccw(c545.83,1401.6) 545.83,1395.38 676.05,1395.38 696.85,1395.38 843,1395.38 846.11,1395.38 851.01,1400.28 861.01,1400.28 866.54,1394.75 876.54,1394.75 882.06,1400.28 892.06,1400.28 897.59,1394.75 907.59,1394.75 912.05,1399.22 922.05,1399.22 925.89,1395.38 929,1395.38 937.85,1395.38 ccw(c937.74,1590.47) 939.58,1395.38 ccw(c937.74,1590.47) 983.52,1400.82 ccw(c937.74,1590.47) 1075.69,1452.52 1099.26,1476.08 ccw(c1092.24,1483.1) 1102.16,1483.1 ccw(c1095.95,1482.87) 1101.66,1485.35 cw(c1117.13,1492.13) 1101.21,1486.46 ccw(c1095.36,1484.35) 1099.87,1488.64 cw(c1103.36,1492.13) v1(1098.43,1492.13)
URX1_PD_P: C34.2 U1.Y2 | length 636.4
  Bottom Copper w6.22: C34.2@534.25,1375.98 ccw(c534.25,1378.36) 535.93,1376.68 538.49,1379.24 ccw(c537.22,1380.51) 539.01,1380.51 540.84,1382.33 cw(c545.24,1377.93) 545.24,1384.15 680.73,1384.15 937.9,1384.15 ccw(c937.79,1590.34) 937.95,1384.15 ccw(c937.79,1590.34) 1083.59,1444.54 1107.21,1468.17 ccw(c1092.31,1483.07) 1113.39,1483.07 ; 1113.39,1483.1 cw(c1119.61,1482.87) 1113.89,1485.33 ccw(c1098.43,1492.13) 1114.34,1486.48 cw(c1120.19,1484.35) v1@1115.68,1488.64 ; v1@1115.68,1488.64 ccw(c1112.19,1492.13) v1(1117.13,1492.13) ; v1@1115.68,1488.64 v1(1117.13,1492.13) ; v1@1115.68,1488.64 v1(1117.13,1492.13)
UTX0_N: C37.1 J1.B10 | length 184.7
  Top Copper w5.46: v3(234.77,1701.91) 250.56,1701.91 J1.B10@261.61,1704.06
  Bottom Copper w6.22: v3(234.77,1701.91) 245.79,1707.59 cw(c248.64,1702.06) 248.64,1708.29 321.23,1708.29 cw(c322.85,1706.67) 322.85,1708.96 346.39,1709.05 cw(c346.46,1692.16) 346.51,1709.05 375.18,1708.96 cw(c375.14,1696.69) 383.62,1705.55 386.71,1702.47 ccw(c388.39,1704.15) C37.1@388.39,1701.77
UTX0_P: C36.1 J1.B11 | length 189.9
  Top Copper w5.46: v3(234.69,1733.13) 250.56,1726.92 J1.B11@261.61,1723.74
  Bottom Copper w6.22: v3(234.69,1733.13) 246.86,1721.27 ccw(c251.2,1725.73) 251.2,1719.51 315.64,1719.51 ccw(c315.64,1721.79) 317.25,1720.18 375.14,1720.18 ccw(c375.14,1732.44) 383.62,1723.59 C36.1@388.39,1727.36
UTX0_PD_N: C37.2 U1.T2 | length 780.1
  Bottom Copper w6.22: C37.2@412.8,1701.77 413.78,1701.77 420.96,1708.96 597.79,1708.96 602.44,1708.96 cw(c602.44,1702.73) 606.82,1707.15 756.07,1557.9 ccw(c768.45,1570.2) 768.45,1552.75 1080.14,1552.75 cw(c1080.14,1546.53) 1083.6,1551.7 1085.39,1550.5 ccw(c1088.84,1555.68) 1085.69,1550.31 ccw(c1097.44,1570.1) 1097.44,1547.09 ccw(c1097.44,1563.98) 1111.99,1555.4 v1(1117.13,1564.05)
UTX0_PD_P: C36.2 U1.T1 | length 774
  Bottom Copper w6.22: C36.2@412.8,1727.36 413.78,1727.36 420.96,1720.18 602.44,1720.18 cw(c602.44,1702.73) 614.73,1715.12 764.07,1565.78 ccw(c768.45,1570.2) 768.45,1563.98 917.75,1563.98 920.87,1563.98 927.24,1570.35 937.24,1570.35 944.23,1563.35 954.23,1563.35 961.23,1570.35 971.23,1570.35 978.22,1563.35 988.22,1563.35 995.22,1570.35 1005.22,1570.35 1012.21,1563.35 1022.21,1563.35 1029.21,1570.35 1039.21,1570.35 1045.58,1563.98 1064.99,1563.98 v1(1097.44,1563.98)
UTX1_N: C39.1 J1.A10 | length 207.7
  Top Copper w6.22: J1.A10@312.8,1556.42 ccw(c319.54,1563.16) 319.54,1553.62 324.66,1553.62 cw(c324.66,1551.17) 326.39,1552.9 ccw(c328.12,1554.64) 328.12,1552.19 415.95,1552.19 cw(c415.95,1498.72) 453.75,1536.53 v3@453.8,1536.48
  Bottom Copper w6.22: v3(453.07,1538.7) cw(c447.76,1533.39) 455.27,1533.39 455.27,1533.07 ccw(c466.61,1533.07) 458.59,1525.05 ccw(c466.61,1533.07) 466.61,1521.73 468.16,1521.73 ccw(c468.16,1532.02) 475.43,1524.74 cw(c482.7,1517.47) 482.7,1527.76 486.65,1527.76 ccw(c486.65,1533.98) 491.05,1529.58 492.09,1530.62 ccw(c490.19,1532.51) 492.88,1532.51 cw(c495.56,1532.51) 493.66,1534.4 495.96,1536.71 cw(c497.64,1535.03) C39.1@497.64,1537.4
UTX1_P: C38.1 J1.A11 | length 208.5
  Top Copper w6.22: J1.A11@312.8,1536.73 cw(c319.54,1529.99) 319.54,1539.53 324.66,1539.53 ccw(c324.66,1541.98) 326.39,1540.24 cw(c328.13,1538.51) 328.13,1540.96 415.88,1540.96 cw(c415.88,1498.56) 433.7,1537.04 cw(c431.06,1531.4) 436.95,1533.39 ccw(c453.07,1538.7) 440.86,1526.92 cw(c436.37,1522.61) 442.29,1524.52 v3@443.25,1524.86
  Bottom Copper w6.22: v3(437.01,1522.64) ccw(c442.32,1527.95) 442.32,1520.44 cw(c442.32,1508.33) 450.88,1516.89 ccw(c466.29,1532.3) 466.29,1510.51 472.8,1510.51 ccw(c472.8,1520.8) 480.08,1513.52 481.27,1514.71 cw(c485.67,1510.31) 485.67,1516.53 cw(c485.67,1510.31) 490.06,1514.72 491.11,1513.67 cw(c489.21,1511.78) 491.89,1511.78 ccw(c494.57,1511.78) C38.1@492.67,1509.89 ; C38.1@492.68,1509.88 C38.1@494.97,1507.59 ; C38.1@494.98,1507.58 ccw(c496.65,1509.27) C38.1@496.65,1506.89
UTX1_PD_N: C39.2 U1.V1 | length 608.2
  Bottom Copper w6.22: C39.2@522.05,1537.4 522.37,1537.4 525.44,1534.34 cw(c523.71,1532.61) 526.15,1532.61 ccw(c528.59,1532.61) 526.86,1530.89 527.64,1530.11 ccw(c534.98,1537.44) 534.98,1527.07 536.38,1527.07 cw(c536.38,1520.07) 541.32,1525.02 ccw(c546.27,1529.97) 546.27,1522.97 927,1522.97 930.11,1522.97 936.75,1529.61 946.75,1529.61 954.01,1522.35 964.01,1522.35 971.28,1529.61 981.28,1529.61 988.54,1522.35 998.54,1522.35 1005.8,1529.61 1015.8,1529.61 1023.06,1522.35 1033.06,1522.35 1040.33,1529.61 1050.33,1529.61 1056.97,1522.97 1067,1522.97 1088.96,1522.97 ccw(c1088.96,1531.27) 1094.82,1525.4 1095.8,1526.38 cw(c1099.3,1522.89) v1(1099.3,1527.83)
UTX1_PD_P: C38.2 U1.V2 | length 608.1
  Bottom Copper w6.22: C38.2@521.06,1506.89 521.28,1506.89 525.83,1511.44 cw(c530.22,1507.03) 531.13,1513.19 540.39,1511.82 ccw(c541.3,1517.97) 541.3,1511.75 1093.27,1511.75 cw(c1093.23,1505.53) 1094.84,1511.54 ccw(c1099.3,1527.83) 1103.41,1511.45 ccw(c1099.3,1527.83) v1@1115.54,1523.21 ; v1@1115.55,1523.23 1116.13,1525.27 v1(1117.06,1528.48)
VBUS: C3.2 C4.2 C8.2 C11.2 IC1.3 J1.A4 J1.A9 J1.B4 J1.B9 R2.1 R5.1 R8.1 U1.G1 U2.1 U2.8 U3.1 U3.8 U4.1 U4.8 | length 895.5
  Top Copper w3.5: J1.B9@261.61,1684.37 265.77,1688.53 281.05,1688.53 286.73,1694.21 J1.A4@312.8,1694.21 314.85,1692.16 v1(346.46,1692.16)
  Top Copper w10: IC1.3@1115.55,2170.98 1121.06,2165.47 v1(1121.06,2083.66) ; v2(1501.97,2485.24) 1494.53,2492.68 1466.97,2492.68 1466.25,2491.95 1466.25,2478.8 1446.1,2458.66 C3.2@1403.54,2458.66 1424.13,2438.07 1473.84,2438.07 1484.7,2427.2 U2.1@1513.44,2427.2 U2.8@1551.44,2427.2 ; C11.2@2101.81,2441.93 2122.95,2422.52 U3.1@2187.26,2422.52 U3.8@2225.26,2422.52 2225.26,2492.26 v2(2223.43,2494.09) ; v1(2852.36,2438.98) 2852.36,2437.99 2871.97,2418.39 U4.1@2934.19,2418.39 U4.1@2943.69,2418.39 ; R8.1@2970.47,2506.89 2970.47,2445.17 U4.1@2943.69,2418.39 ; U4.8@2972.19,2418.39 U4.1@2943.69,2418.39
  other v1: 312.8,1576.1 261.61,1585.94 1098.43,1726.38 1397.64,2450.79
  other v2: 2100.39,2441.93
XI: C12.2 U1.AA4 Y1.3 | length 312
  Top Copper w3.5: U1.AA4@1153.23,1473.9 1153.96,1473.16 1153.96,1464.71 1280.29,1338.38 1280.29,1326.99 1302.17,1305.12 Y1.3@1306.1,1305.12 1308.07,1303.15 C12.2@1382.87,1303.15
XO: C12.1 U1.Y4 Y1.1 | length 471.4
  Top Copper w3.5: v1(1214.87,1237.07) 1252.3,1237.07 1264.33,1249.11 1264.33,1255.03 1276.37,1267.06 1363.84,1267.06 1380.91,1250 C12.1@1382.87,1250
  Signal Layer 2 w3.5: v1(1153.54,1492.13) 1173.92,1471.75 1173.92,1453.05 1187.15,1439.82 1187.15,1264.79 v1(1214.87,1237.07)
pads on no net: J2.6 J2.8 J2.10 J2.20 J2.22 J2.24 J2.26 J2.28 J2.30 J2.32 J2.34 J2.36 J2.38 J2.40 J2.42 J2.44 J2.46 J2.48 J2.54 J2.56 J2.58 J2.67 J2.68 J2.73 J2.MH1 J2.MH2 U1.A1 U1.A6 U1.A7 U1.A8 U1.A9 U1.A10 U1.A11 U1.A12 U1.A13 U1.A14 U1.A15 U1.A16 U1.A17 U1.A18 U1.A20 U1.AA7 U1.AA10 U1.AA11 U1.B1 U1.B2 U1.B3 U1.B4 U1.B5 U1.B6 U1.B7 U1.B8 U1.B9 U1.B10 U1.B11 U1.B12 U1.B13 U1.B14 U1.B15 U1.B16 U1.B17 U1.B18 U1.B19 U1.B20 U1.C1 U1.C2 U1.C20 U1.C21 U1.D1 U1.D2 U1.D20 U1.D21 U1.E2 U1.E20 U1.E21 U1.F2 U1.F20 U1.F21 U1.G2 U1.G20 U1.H2 U1.H20 U1.J2 U1.Y7 U1.Y10 U1.Y11
copper on no net:
  other v1: 4496.06,1408.46 4609.25,1483.27 4586.61,1527.56 4595.47,1623.03 4547.24,1669.29 4564.96,1746.06 4528.54,1769.68 4574.8,1801.18 4618.11,1858.27 4504.92,1939.96

## Polygon pours and split planes (outlines as drawn)
VBUS on Signal Layer 3 "VBUS_L04_P001" (solid, pour order 1): 248.03,855.32 248.03,1440.94 248.03,2583.66 3230.32,2583.66 3230.32,2352.36 1155.51,2352.36 1155.51,855.32
GND on Signal Layer 3 "GND_L04_P012" (solid, pour order 12): 1155.51,863.34 1155.51,1526.57 1160.43,1531.5 1439.96,1531.5 1439.96,1639.76 1436.02,1643.7 1543.31,1750.98 3246.06,1750.98 3246.06,2585.63 5111.22,2585.63 5104.33,2578.74 5104.33,881.89
1V05 on Signal Layer 3 "1V05_L04_P000" (solid, pour order 0): 1340.55,1773.62 1540.35,1973.43 1540.35,2098.94 1552.64,2111.22 2591.83,2111.2 2593.5,2330.71 3237.2,2330.71 3237.2,1754.92 1532.48,1754.92 1429.21,1651.65 1429.21,1543.31 1215.04,1543.31 1215.04,1773.62
3V3 on Signal Layer 3 "3V3_L04_P002" (solid, pour order 2): 1524.61,1961.61 1306.57,1743.58 1243.11,1743.58 1243.11,2242.13 1797.24,2242.13 1797.24,2139.76 1548.23,2139.76 1524.61,2116.14
1V8 on Signal Layer 3 "1V8_L04_P003" (solid, pour order 3): 1243.11,1787.4 1243.11,2242.13 1797.24,2242.13 1797.24,2124.02 1802.17,2119.09 2535.43,2119.09 2535.43,2346.46 1159.45,2346.46 1159.45,1530.51 1219.49,1530.51 1218.5,1531.5 1218.5,1762.8
GND on Bottom Copper "GND_L06_P004" (solid, pour order 4): 0,2719.49 cw(c16.63,2702.85) 16.63,2726.38 5134.84,2726.38 5134.84,2021.22 ccw(c5171.81,2021.22) 5145.67,1995.08 ccw(c5102.9,1952.31) 5102.9,2012.8 0,2012.8
GND on Bottom Copper "GND_L06_P005" (solid, pour order 5): 3.94,1174.21 cw(c20.57,1157.58) 20.57,1181.1 5138.78,1181.1 5138.78,475.94 ccw(c5175.74,475.94) 5149.61,449.8 ccw(c5106.83,407.03) 5106.83,467.52 3.94,467.52
GND on Signal Layer 2 "GND_L03_P007" (solid, pour order 7): 0,2727.36 5128.46,2727.36 ccw(c5128.46,2747.52) 5142.72,2733.27 ccw(c5149.84,2726.14) 5139.76,2726.14 5139.76,1845.47 0,1845.47
GND on Signal Layer 2 "GND_L03_P008" (solid, pour order 8): -5.47,1289.48 5135,1289.48 5135,855.32 -5.47,855.32
GND on Top Copper "GND_L01_P011" (solid, pour order 11): 0,2726.38 5135.93,2726.38 ccw(c5135.93,2749.9) 5152.56,2733.27 ccw(c5192.95,2692.87) 5135.83,2692.87 5135.83,855.32 0,855.32
3V3 on Top Copper "3V3_L01_P006" (solid, pour order 6): 1695.64,2131.34 1695.64,2222.66 1690.94,2227.36 1555.12,2227.36 1555.12,2133.47
1V8 on Top Copper "1V8_L01_P009" (solid, pour order 9): 2423.23,2103.35 2423.23,2255.91 2418.31,2260.83 2411.42,2253.94 2318.9,2253.94 2318.9,2102.03
1V05 on Top Copper "1V05_L01_P010" (solid, pour order 10): 3133.65,2079.72 3132.1,2081.27 3132.1,2251.97 3038.6,2251.97 3035.64,2236.22 3035.64,2223.43 3035.64,2081.69
GND on Signal Layer 4 (split plane): 5114.9,875.41 20.1,875.41 20.1,2709.9 5114.9,2709.9
GND on Signal Layer 1 (split plane): 5114.9,875.41 20.1,875.41 20.1,2709.9 5114.9,2709.9

## Other copper
Top Copper:
  pour cut-out: 4091.79,1976.65 cw(c4103.01,1965.44) 4103.01,1981.3 4492.04,1981.3 cw(c4492.05,1881.31) 4562.75,1952.01 4590.97,1923.8 cw(c4525.45,1858.27) 4618.11,1858.27 4618.11,1463.67 cw(c4518.12,1463.66) 4588.82,1392.95 4578.74,1382.87 cw(c4543.1,1418.51) 4543.1,1368.11 4086.74,1368.11 cw(c4096.89,1375.02) 4084.83,1377.31 4084.83,1487.2 ccw(c4091.07,1485.75) 4085.63,1482.37 4085.63,1501.97
  pour cut-out: 1023.62,1886.81 cw(c1030.75,1879.68) 1030.75,1889.76 1502.95,1889.76 1502.95,1444.14 cw(c1492.87,1444.14) 1500,1437.01 cw(c1492.87,1444.14) 1492.87,1434.06 1031.5,1434.06
  pour cut-out: 169.29,1412.4 169.29,1905.51 189.21,1925.44 cw(c259.93,1854.72) 259.93,1954.72 594.41,1954.72 cw(c594.41,1854.72) 665.12,1925.44 666,1924.55 ccw(c691.33,1899.22) 655.51,1899.22 655.51,1488.27 cw(c555.51,1488.27) 626.22,1417.56 624.02,1415.35

## Silkscreen, mask and mechanical layers (free items; w line width, h text height)
Top Overlay:
  text "© John Simons 2024 / OpenChips" at 4260,929 h60